# EAGLE board takiuino-m18-routed-smashed-v32 (EAGLE 7.2.0)
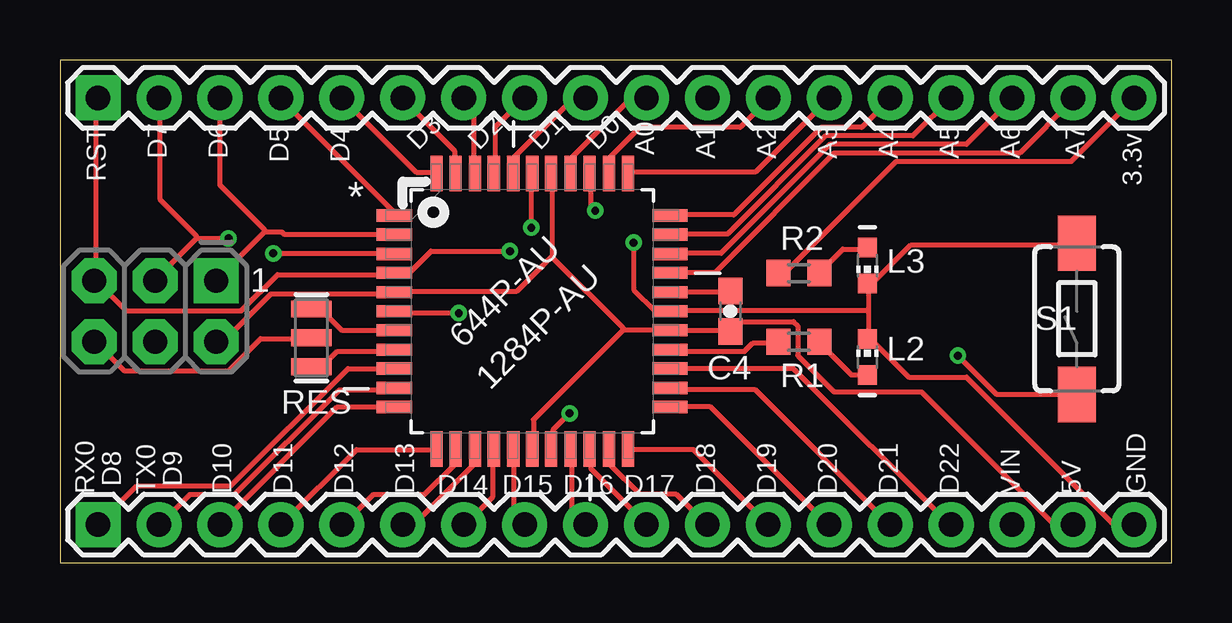
[diagram p0: board, top side]
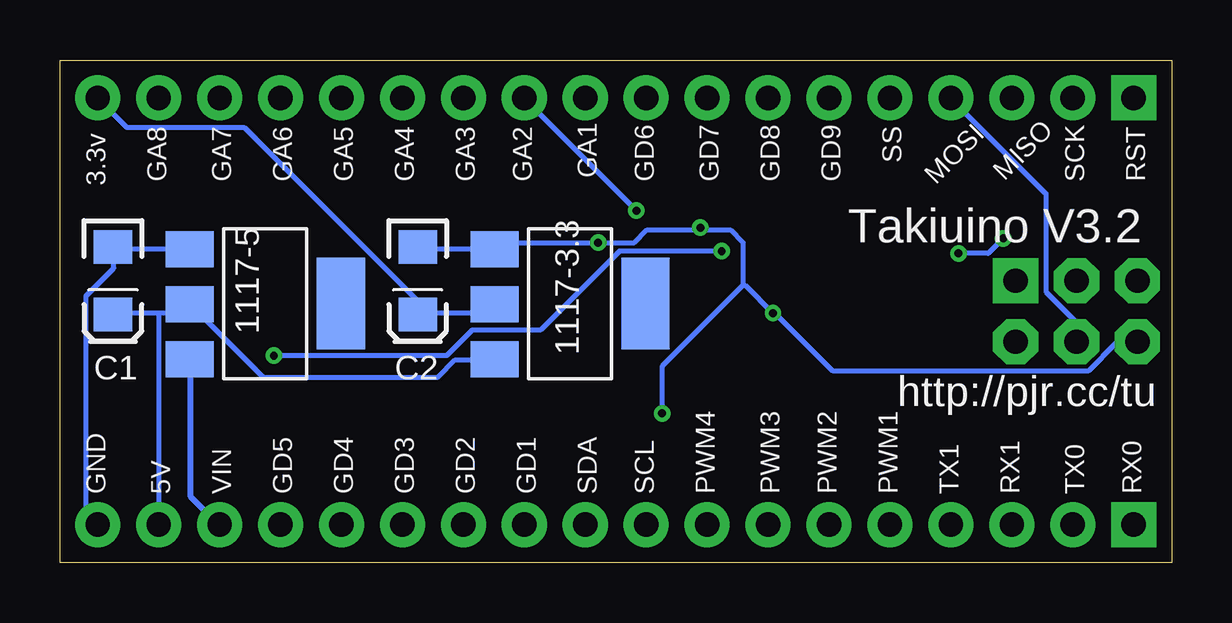
[diagram p1: board, bottom side, seen from below]

Size 46.34 x 20.95 mm. Coordinates in mm from the lower left corner, seen from the top.
Outline: 0,0 46.34,0 46.34,20.95 0,20.95 0,0
Copper layers (1*16): Top 0.0356mm / dielectric 1.5011mm / Bottom 0.0356mm
Design rules "LaenPCBOrder *": minimum track width 6mil, minimum drill 13mil, track to track 6mil, track to pad 6mil, pad to pad 6mil, via to via 16mil, smd to smd 6mil, copper to edge 15mil, drill to drill 6mil, minimum pad ring 7mil, minimum via ring 7mil, stop-mask expansion 3mil, vias tented up to drill 0mil, thermal gap 10mil
Net classes: 0 default: width 0.203 mm; 1 hi: width 0.254 mm

## Footprints (pad centres in the part's own frame; a part is rotated, then mirrored left to right if it is on the bottom)
SOT223 = smd 1.499 x 2.007: 1 -2.261,-3.15; 2 0.025,-3.15; 3 2.311,-3.15 | smd 3.81 x 2.007: 4 0,3.15
EIA3216 = smd 1.4 x 1.6: A 1.4,0; C -1.4,0
0603-CAP = smd 1.1 x 1: 1 -0.85,0; 2 0.85,0
2X3-NS = drill 1.016 pad 1.88 square: 1 -2.54,-1.27 | drill 1.016 pad 1.88 octagon: 2 -2.54,1.27; 3 0,-1.27; 4 0,1.27; 5 2.54,-1.27; 6 2.54,1.27
CHIP-LED0603 = smd 0.8 x 0.8: A 0,-0.75; C 0,0.75
R0603 = smd 1 x 1.1: 1 -0.85,0; 2 0.85,0
TACTILE-SWITCH-1101NE = smd 2.3 x 1.6: 1 -3.15,0; 2 3.15,0
QFP80P1200X1200X120-44N = smd 1.473 x 0.508: 1 -5.74,3.988; 2 -5.74,3.2; 3 -5.74,2.388; 4 -5.74,1.6; 5 -5.74,0.787; 6 -5.74,0; 7 -5.74,-0.787; 8 -5.74,-1.6; 9 -5.74,-2.388; 10 -5.74,-3.2; 11 -5.74,-3.988; 23 5.74,-3.988; 24 5.74,-3.2; 25 5.74,-2.388; 26 5.74,-1.6; 27 5.74,-0.787; 28 5.74,0; 29 5.74,0.787; 30 5.74,1.6; 31 5.74,2.388; 32 5.74,3.2; 33 5.74,3.988 | smd 0.508 x 1.473: 12 -3.988,-5.74; 13 -3.2,-5.74; 14 -2.388,-5.74; 15 -1.6,-5.74; 16 -0.787,-5.74; 17 0,-5.74; 18 0.787,-5.74; 19 1.6,-5.74; 20 2.388,-5.74; 21 3.2,-5.74; 22 3.988,-5.74; 34 3.988,5.74; 35 3.2,5.74; 36 2.388,5.74; 37 1.6,5.74; 38 0.787,5.74; 39 0,5.74; 40 -0.787,5.74; 41 -1.6,5.74; 42 -2.388,5.74; 43 -3.2,5.74; 44 -3.988,5.74
1X18 = drill 1.016 pad 1.88 square: 1 0,0 | drill 1.016 pad 1.88: 2 2.54,0; 3 5.08,0; 4 7.62,0; 5 10.16,0; 6 12.7,0; 7 15.24,0; 8 17.78,0; 9 20.32,0; 10 22.86,0; 11 25.4,0; 12 27.94,0; 13 30.48,0; 14 33.02,0; 15 35.56,0; 16 38.1,0; 17 40.64,0; 18 43.18,0
RESONATOR-SMD = smd 0.7 x 1.7: 1 -1.2,0; 2 0,0; 3 1.2,0

## Placement (x,y rotation side)
3.3VREG  REG1117  [SOT223]  25.08,10.79 270 bottom
5VREG  REG1117  [SOT223]  37.78,10.79 270 bottom
C1  10uf  [EIA3216]  44.13,11.75 270 bottom
C2  10uf  [EIA3216]  31.43,11.75 270 bottom
C4  0.1uf  [0603-CAP]  27.94,10.48 270 top
JP1  [2X3-NS]  3.97,10.48 180 top
LED2  [CHIP-LED0603]  33.66,8.57 0 top
LED3  [CHIP-LED0603]  33.66,12.38 180 top
R1  330  [R0603]  30.8,9.21 180 top
R2  220  [R0603]  30.8,12.06 180 top
S1  SWITCH-MOMENTARY-2SMD-1101NE  [TACTILE-SWITCH-1101NE]  42.39,10.16 90 top
U1  ATMEGA644P-20AU  [QFP80P1200X1200X120-44N]  19.68,10.48 0 top
U$1  M18_  [1X18]  1.59,1.59 0 top
U$2  M18_  [1X18]  1.59,19.37 0 top
U$3  RESONATORSMD  [RESONATOR-SMD]  10.48,9.37 270 top

## Library data of the parts
3.3VREG 5VREG = burr-brown; MPN: REG1117; OC_FARNELL: 1097566; OC_NEWARK: 14P6981
C1 C2 = SparkFun-Passives
C4 = SparkFun-Capacitors
JP1 U$1 U$2 = SparkFun-Connectors
LED2 LED3 = led
R1 R2 = adafruit
S1 = SparkFun-Electromechanical; PROD_ID: SWCH-00815
U1 = Atmel_By_element14_Batch_1-00; MPN: ATMEGA644P-20AU; OC_FARNELL: 1455121; OC_NEWARK: 58M3746; PACKAGE: TQFP-44; SUPPLIER: Atmel
U$3 = SparkFun

## Nets
3.3V: 3.3VREG.2 C2.A R2.2 U$2.18
5V: 3.3VREG.3 5VREG.2 C1.A C4.2 JP1.2 U1.5 U1.17 U1.27 U1.38 U$1.17
GA_1: U1.37 U$2.10
GA_2: U1.36 U$2.11
GA_3: U1.35 U$2.12
GA_4: U1.34 U$2.13
GA_5: U1.33 U$2.14
GA_6: U1.32 U$2.15
GA_7: U1.31 U$2.16
GA_8: U1.30 U$2.17
GD1: U1.21 U$1.11
GD2: U1.22 U$1.12
GD3: U1.23 U$1.13
GD4: U1.24 U$1.14
GD5: U1.25 U$1.15
GD_6: U1.40 U$2.9
GD_7: U1.41 U$2.8
GD_8: U1.42 U$2.7
GD_9: U1.43 U$2.6
GND: 3.3VREG.1 5VREG.1 C1.C C2.C JP1.6 LED2.C LED3.C S1.2 U1.6 U1.18 U1.28 U1.39 U$1.18 U$3.2
LED_1: R1.2 U1.26
MISO: JP1.1 U1.2 U$2.3
MOSI: JP1.4 U1.1 U$2.4
N$1: U1.8 U$3.3
N$2: U1.7 U$3.1
N$3: C4.1 U1.29
N$4: LED2.A R1.1
N$6: LED3.A R2.1
PWM_1: U1.13 U$1.5
PWM_2: U1.14 U$1.6
PWM_3: U1.15 U$1.7
PWM_4: U1.16 U$1.8
RESET: JP1.5 S1.1 U1.4 U$2.1
RX0: U1.9 U$1.1
RX1: U1.11 U$1.3
SCK: JP1.3 U1.3 U$2.2
SCL: U1.19 U$1.9
SDA: U1.20 U$1.10
SS: U1.44 U$2.5
TX0: U1.10 U$1.2
TX1: U1.12 U$1.4
VIN [hi]: 5VREG.3 U$1.16

## Tracks (layer width: path | path; a pad name or v marks a point on that pad's centre or on a via)
3.3V
  Top 0.203: R2.2 29.96,12.09 30.23,12.09 34.85,16.71 42.14,16.71 44.72,19.29 U$2.18
  Bottom 0.203: 3.3VREG.2 28.27,10.76 28.63,10.4 31.38,10.4 C2.A 31.38,10.49 31.38,10.85 38.67,18.14 43.56,18.14 44.72,19.29 U$2.18
5V
  Top 0.203: JP1.2 6.58,9.25 6.84,9.25 8.8,11.2 13.87,11.2 U1.5 14.05,11.29 19.02,11.29 20.45,12.71 20.54,12.71 | 23.47,9.69 19.74,5.96 19.74,4.8 U1.17 | 23.47,9.69 U1.27 27.91,9.69 C4.2 28,9.69 28.36,10.05 30.58,10.05 30.76,9.87 30.76,8.62 32.27,7.11 35.92,7.11 41.43,1.6 U$1.17 | 20.54,12.71 20.54,16.18 U1.38 | 20.54,12.71 23.47,9.78 23.47,9.69
  Bottom 0.203: 42.23,10.4 41.34,10.4 40.98,10.76 5VREG.2 40.89,10.76 37.87,7.73 30.58,7.73 29.87,8.45 28.27,8.45 3.3VREG.3 | 42.23,10.4 44.09,10.4 C1.A | 42.23,10.4 U$1.17
GA_1
  Top 0.203: U1.37 21.34,16.27 21.34,16.89 23.74,19.29 24.45,19.29 U$2.10
GA_2  (via drill 0.33)
  Top 0.203: v22.31,14.67 22.14,14.85 22.14,16.18 U1.36
  Bottom 0.203: v22.31,14.67 26.94,19.29 U$2.11
GA_3
  Top 0.203: U1.35 22.94,16.27 22.94,16.89 24.18,18.14 28.36,18.14 29.52,19.29 U$2.12
GA_4
  Top 0.203: U1.34 23.74,16.27 28.98,16.27 32,19.29 U$2.13
GA_5
  Top 0.203: U1.33 25.43,14.49 28.09,14.49 31.74,18.14 33.43,18.14 34.58,19.29 U$2.14
GA_6
  Top 0.203: U$2.15 35.56,17.78 31.91,17.78 27.83,13.69 25.43,13.69 U1.32
GA_7
  Top 0.203: U1.31 25.43,12.89 27.56,12.89 32.09,17.42 37.78,17.42 39.65,19.29 U$2.16
GA_8
  Top 0.203: U1.30 27.29,12.09 32.27,17.07 40.01,17.07 42.23,19.29 U$2.17
GD1
  Top 0.203: U1.21 22.94,4.71 22.94,4.09 24.18,2.85 25.69,2.85 26.94,1.6 U$1.11
GD2
  Top 0.203: U$1.12 26.4,4.71 23.74,4.71 U1.22
GD3
  Top 0.203: U1.23 27.11,6.49 32,1.6 U$1.13
GD4
  Top 0.203: U1.24 25.43,7.2 28.98,7.2 34.58,1.6 U$1.14
GD5
  Top 0.203: U1.25 30.58,8.09 37.07,1.6 U$1.15
GD_6
  Top 0.203: U1.40 18.94,16.27 18.94,16.89 21.34,19.29 21.87,19.29 U$2.9
GD_7
  Top 0.203: U$2.8 18.14,18.14 18.14,16.27 U1.41
GD_8
  Top 0.203: U1.42 17.25,16.27 17.25,18.94 16.89,19.29 U$2.7
GD_9
  Top 0.203: U1.43 16.45,16.27 16.45,17.16 14.31,19.29 U$2.6
GND  (via drill 0.33)
  Top 0.203: 33.69,10.49 33.69,11.56 LED3.C 33.78,11.56 35.47,13.25 41.72,13.25 S1.2 | 33.69,10.49 33.69,9.34 LED2.C 33.78,9.34 35.38,7.73 37.78,7.73 43.92,1.6 44.72,1.6 U$1.18 | 33.69,10.49 U1.28 25.34,10.49 24.8,10.49 23.91,11.38 v23.91,13.34 | U$3.2 10.4,9.34 8.36,9.34 7.02,8 2.67,8 1.51,9.16 JP1.6 | v21.25,6.22 20.54,5.51 20.54,4.8 U1.18 | v16.62,10.4 13.96,10.4 U1.6 | v19.65,13.96 19.65,16.18 U1.39
  Bottom 0.203: 5VREG.1 40.98,13.07 44.09,13.07 C1.C 44.09,12.98 44.09,12.27 45.25,11.11 45.25,2.04 44.81,1.6 U$1.18 | v21.25,6.22 21.25,8.18 17.87,11.56 | 17.87,11.56 17.87,13.34 18.4,13.87 19.65,13.87 | 19.65,13.87 21.87,13.87 22.4,13.34 v23.91,13.34 27.91,13.34 28.18,13.07 3.3VREG.1 28.27,13.07 31.38,13.07 C2.C | 17.87,11.56 17.78,11.56 v16.62,10.4 16.54,10.4 14.13,8 3.47,8 2.31,9.16 1.51,9.16 JP1.6 | v19.65,13.96 19.65,13.87
LED_1
  Top 0.203: R1.2 29.87,9.16 28.89,9.16 28.54,8.8 25.43,8.8 U1.26
MISO
  Top 0.203: 8.53,13.78 9.25,13.78 9.34,13.69 13.87,13.69 U1.2 | 8.53,13.78 6.58,11.82 JP1.1 | U$2.3 6.67,15.73 8.53,13.87 8.53,13.78
MOSI
  Top 0.203: U1.1 13.87,14.49 13.87,14.67 9.25,19.29 U$2.4
  Bottom 0.203: JP1.4 4,9.25 4,10.05 5.25,11.29 5.25,15.38 9.16,19.29 U$2.4
N$1
  Top 0.203: U1.8 13.87,8.8 11.56,8.8 10.94,8.18 U$3.3
N$2
  Top 0.203: U1.7 11.73,9.69 10.94,10.49 10.49,10.49 U$3.1
N$3
  Top 0.203: C4.1 27.91,11.29 25.43,11.29 U1.29
N$4
  Top 0.203: LED2.A 33.6,7.82 32.98,7.82 31.65,9.16 R1.1
N$6
  Top 0.203: LED3.A 33.6,13.07 32.63,13.07 31.65,12.09 R2.1
PWM_1
  Top 0.203: U1.13 16.45,4.71 16.45,4.09 15.2,2.85 13.07,2.85 11.82,1.6 U$1.5
PWM_2
  Top 0.203: U1.14 17.25,4.71 17.25,4.09 14.76,1.6 14.31,1.6 U$1.6
PWM_3
  Top 0.203: U1.15 18.05,4.71 18.05,2.76 16.89,1.6 U$1.7
PWM_4
  Top 0.203: U1.16 18.94,4.71 18.94,1.96 19.29,1.6 U$1.8
RESET  (via drill 0.33)
  Top 0.203: v37.43,8.62 39.03,7.02 41.24,7.02 S1.1 | v18.76,12.98 15.47,12.98 14.58,12.09 13.96,12.09 U1.4 13.87,12 9.07,12 7.56,10.49 2.76,10.49 1.51,11.73 JP1.5 1.51,11.82 1.51,19.29 U$2.1
  Bottom 0.203: v37.43,8.62 30.23,8.62 29.16,9.69 26.31,9.69 23.02,12.98 v18.76,12.98
RX0
  Top 0.203: U1.9 12,8.09 7.11,3.2 3.2,3.2 U$1.1
RX1
  Top 0.203: U1.11 11.56,6.49 U$1.3
SCK  (via drill 0.33)
  Top 0.203: v8.89,12.89 13.87,12.89 U1.3 | 5.69,13.51 v7.02,13.51 | 5.69,13.51 4,11.82 JP1.3 | U$2.2 4.18,19.29 4.18,15.11 5.69,13.6 5.69,13.51
  Bottom 0.203: v8.89,12.89 7.64,12.89 v7.02,13.51
SCL
  Top 0.203: U1.19 21.34,4.71 21.34,2.13 21.87,1.6 U$1.9
SDA
  Top 0.203: U1.20 22.14,4.71 22.14,3.91 U$1.10
SS
  Top 0.203: U$2.5 14.85,16.27 15.65,16.27 U1.44
TX0
  Top 0.203: U1.10 13.87,7.2 11.65,7.2 7.29,2.85 5.42,2.85 4.18,1.6 U$1.2
TX1
  Top 0.203: U1.12 15.65,4.71 12.36,4.71 9.25,1.6 U$1.4
VIN
  Bottom 0.254: 5VREG.3 40.89,8.45 40.89,2.76 39.74,1.6 U$1.16

## Text on the board
tNames: D7 | D6 | D5 | D4 | D3 | D2 | D1 | D0 | A0 | A1 | A2 | A3 | A4 | A5 | A6 | A7 | RST | 3.3v | L3 | 1 | S1 | 644P-AU | C4 | L2 | 1284P-AU | RES | RX0 | D8 | TX0 | D9 | D10 | D11 | D12 | D13 | D14 | D15 | D16 | D17 | D18 | D19 | D20 | D21 | D22 | VIN | 5V | GND
bNames: SS | RST | SCK | MISO | MOSI | GD9 | GD8 | GD7 | GD6 | GA1 | GA2 | GA3 | GA4 | GA5 | GA6 | GA7 | GA8 | 3.3v | Takiuino V3.2 | 1117-3.3 | 1117-5 | http://pjr.cc/tu | C2 | C1 | RX0 | TX0 | RX1 | TX1 | PWM1 | PWM2 | PWM3 | PWM4 | SCL | SDA | GD1 | GD2 | GD3 | GD4 | GD5 | VIN | 5V | GND